# EAGLE board attiny85 (EAGLE 9.6.2)
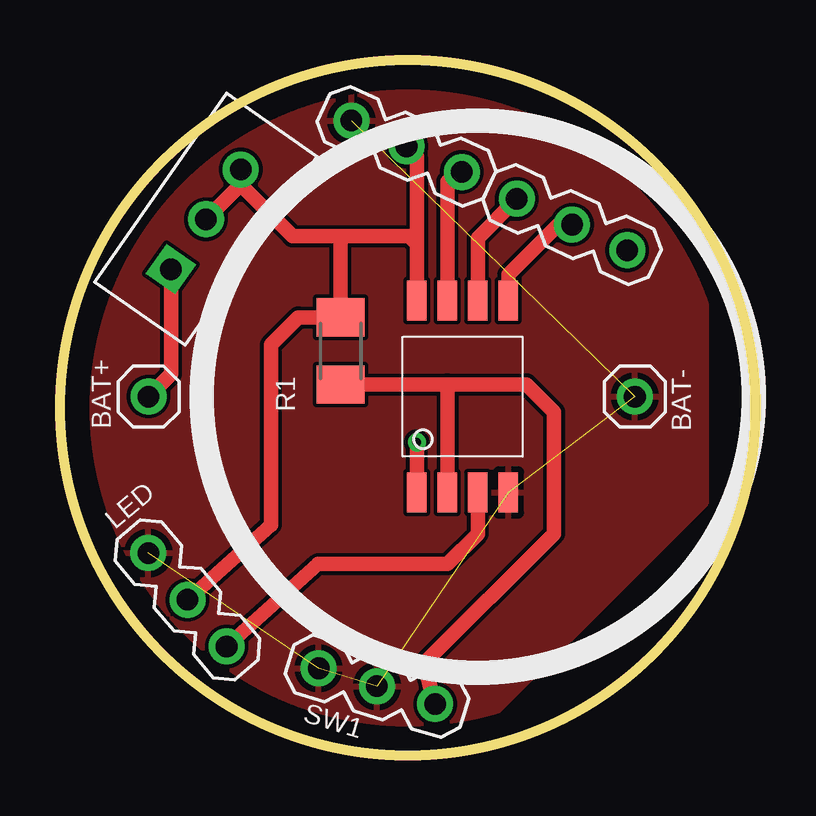
[diagram p0: board, top side]
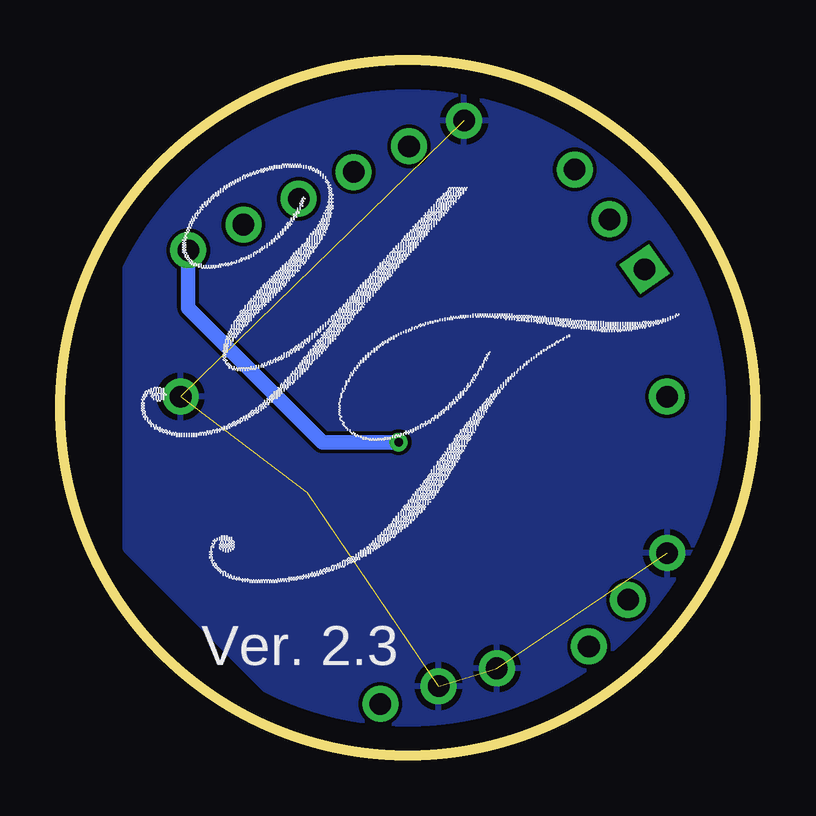
[diagram p1: board, bottom side, seen from below]

Size 29 x 29 mm. Coordinates in mm from the lower left corner, seen from the top.
Outline: circle at 14.5,14.5 radius 14.5
Copper layers (1*16): Top 0.035mm / dielectric 1.5mm / Bottom 0.035mm
Design rules "default": minimum track width 6mil, minimum drill 0.35mm, track to track 6mil, track to pad 6mil, pad to pad 6mil, via to via 6mil, smd to smd 6mil, copper to edge 40mil, drill to drill 6mil, minimum pad ring 10mil, minimum via ring 8mil, stop-mask expansion 4mil, vias tented up to drill 0mil, thermal gap 10mil

## Footprints (pad centres in the part's own frame; a part is rotated, then mirrored left to right if it is on the bottom)
ATTINY85-20SUR = smd 1.676 x 0.813: P1 -4,1.905; P2 -4,0.635; P3 -4,-0.635; P4 -4,-1.905; P5 4,-1.905; P6 4,-0.635; P7 4,0.635; P8 4,1.905
PINHEAD-MA01-1 = drill 0.9 pad 1.5: 1 1.27,0
PINHEAD-MA03-1 = drill 0.9 pad 1.5: 1 -1.27,0; 2 1.27,0; 3 3.81,0
M3216 = smd 1.6 x 2: 1 -1.4,0; 2 1.4,0
SW3-1 = drill 0.9 pad 1.5 square: 1 -1.27,0 | drill 0.9 pad 1.5: 2 1.27,0; 3 3.81,0

## Placement (x,y rotation side)
ATTINY85-1  ATTINY85  [ATTINY85-20SUR]  16.79,14.96 90 top
BAT+  bat+  [PINHEAD-MA01-1]  2.42,14.96 0 top
BAT-  bat-  [PINHEAD-MA01-1]  22.7,14.96 0 top
LED  LED1  [PINHEAD-MA03-1]  4.5,7.46 310 top
LOGO1  [LOGO-YT1]  26.31,6.71 0 bottom
R1  10K  [M3216]  11.71,16.87 90 top
SV1  PIN-A  [PINHEAD-MA03-1]  22.5,21.6 155 top
SV2  PIN-B  [PINHEAD-MA03-1]  15.6,24.87 155 top
SW1  bat+  [PINHEAD-MA03-1]  12,3.27 343 top
SW2  POWER  [SW3-1]  5.36,21.31 55 top

## Library data of the parts
ATTINY85-1 BAT+ BAT- LOGO1 = ytani1
LED SV1 SV2 SW1 = ytani1; OC_FARNELL: unknown; OC_NEWARK: unknown
R1 = rcl; SPICEPREFIX: R
SW2 = ytani1; MF: HiLetgo; URL_AMAZON: https://www.amazon.co.jp/gp/product/B01LYVYQNO/

## Nets
+3V3: BAT+.1 SW2.1
BAT+: ATTINY85-1.P8 LED.2 R1.2 SV2.2 SW2.2 SW2.3
GND: ATTINY85-1.P4 BAT-.1 LED.1 SV2.3 SW1.1 SW1.2
N$1: ATTINY85-1.P3 LED.3
N$2: ATTINY85-1.P7 SV2.1
N$3: ATTINY85-1.P6 SV1.3
N$4: ATTINY85-1.P1 SV1.1
N$5: ATTINY85-1.P5 SV1.2
PB3: ATTINY85-1.P2 R1.1 SW1.3

## Tracks (layer width: path | path; a pad name or v marks a point on that pad's centre or on a via)
+3V3
  Top 0.61: BAT+.1 4.63,15.9 SW2.1
BAT+
  Top 0.61: LED.2 8.79,9.62 8.79,17.13 9.93,18.27 R1.2 11.71,21.65 | SW2.2 7.54,23.81 SW2.3 7.54,23.8 9.69,21.65 11.71,21.65 | 11.71,21.65 14.54,21.65 14.88,21.31 | 14.88,21.31 ATTINY85-1.P8 | SV2.2 14.88,24.97 14.88,21.31
GND  (5 unrouted)
  pour Top: 0.27,6.71 0.27,21.95 7.89,29.57 19.32,29.57 26.95,21.95 26.95,10.52 15.52,-0.91 7.89,-0.91
  pour Bottom: 0.27,8.62 0.27,21.31 7.89,28.94 19.32,28.94 26.31,21.95 26.31,8.62 17.42,-0.28 9.16,-0.28
N$1
  Top 0.61: LED.3 10.76,7.98 16.15,7.98 17.42,9.25 ATTINY85-1.P3
N$2
  Top 0.61: SV2.1 16.15,23.93 ATTINY85-1.P7
N$3
  Top 0.61: SV1.3 17.42,21.58 ATTINY85-1.P6
N$4  (via drill 0.35)
  Top 0.61: ATTINY85-1.P1 v14.88,13.06
  Bottom 0.61: v14.88,13.06 18.05,13.06 23.65,18.66 SV1.1
N$5
  Top 0.61: ATTINY85-1.P5 18.69,20.05 20.78,22.14 SV1.2
PB3
  Top 0.61: R1.1 16.15,15.47 | 16.15,15.47 19.45,15.47 20.59,14.33 20.59,9.25 15.18,3.83 SW1.3 | 16.15,15.47 ATTINY85-1.P2

## Text on the board
bPlace: Ver. 2.3